# Altium PCB Son_BU_ESP32_V1.PcbDoc
Units mil, origin at the board's own origin, x right, y up, seen from the top; angles counter-clockwise.
Board outline 6000 x 4000 mil, 2 copper layers (Top Layer, Bottom Layer); 32 components, 22 nets, 120 pads, 27 vias.
Unrouted connection lines stored in the file: 1.
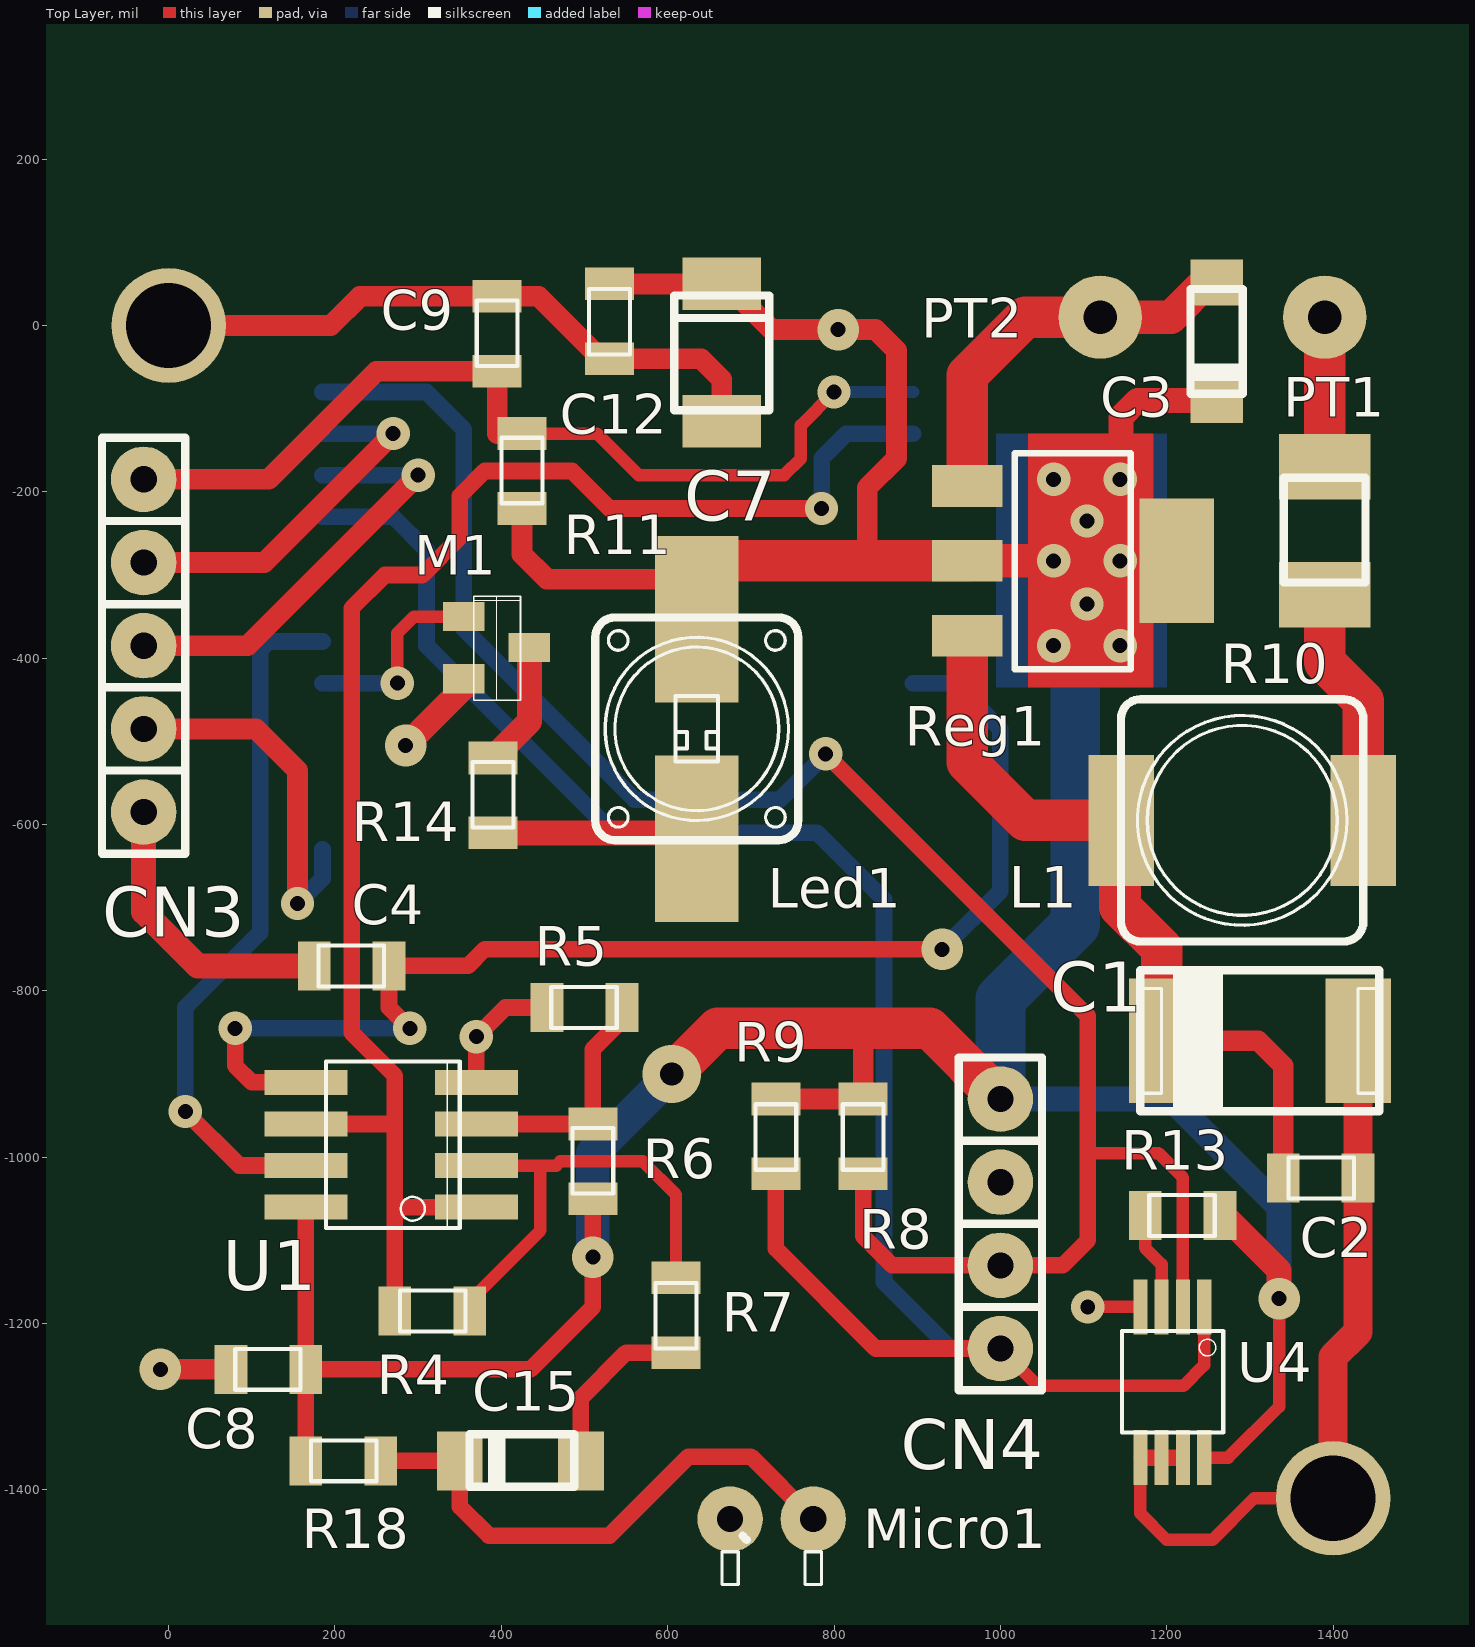
[diagram p0: Top Layer view]
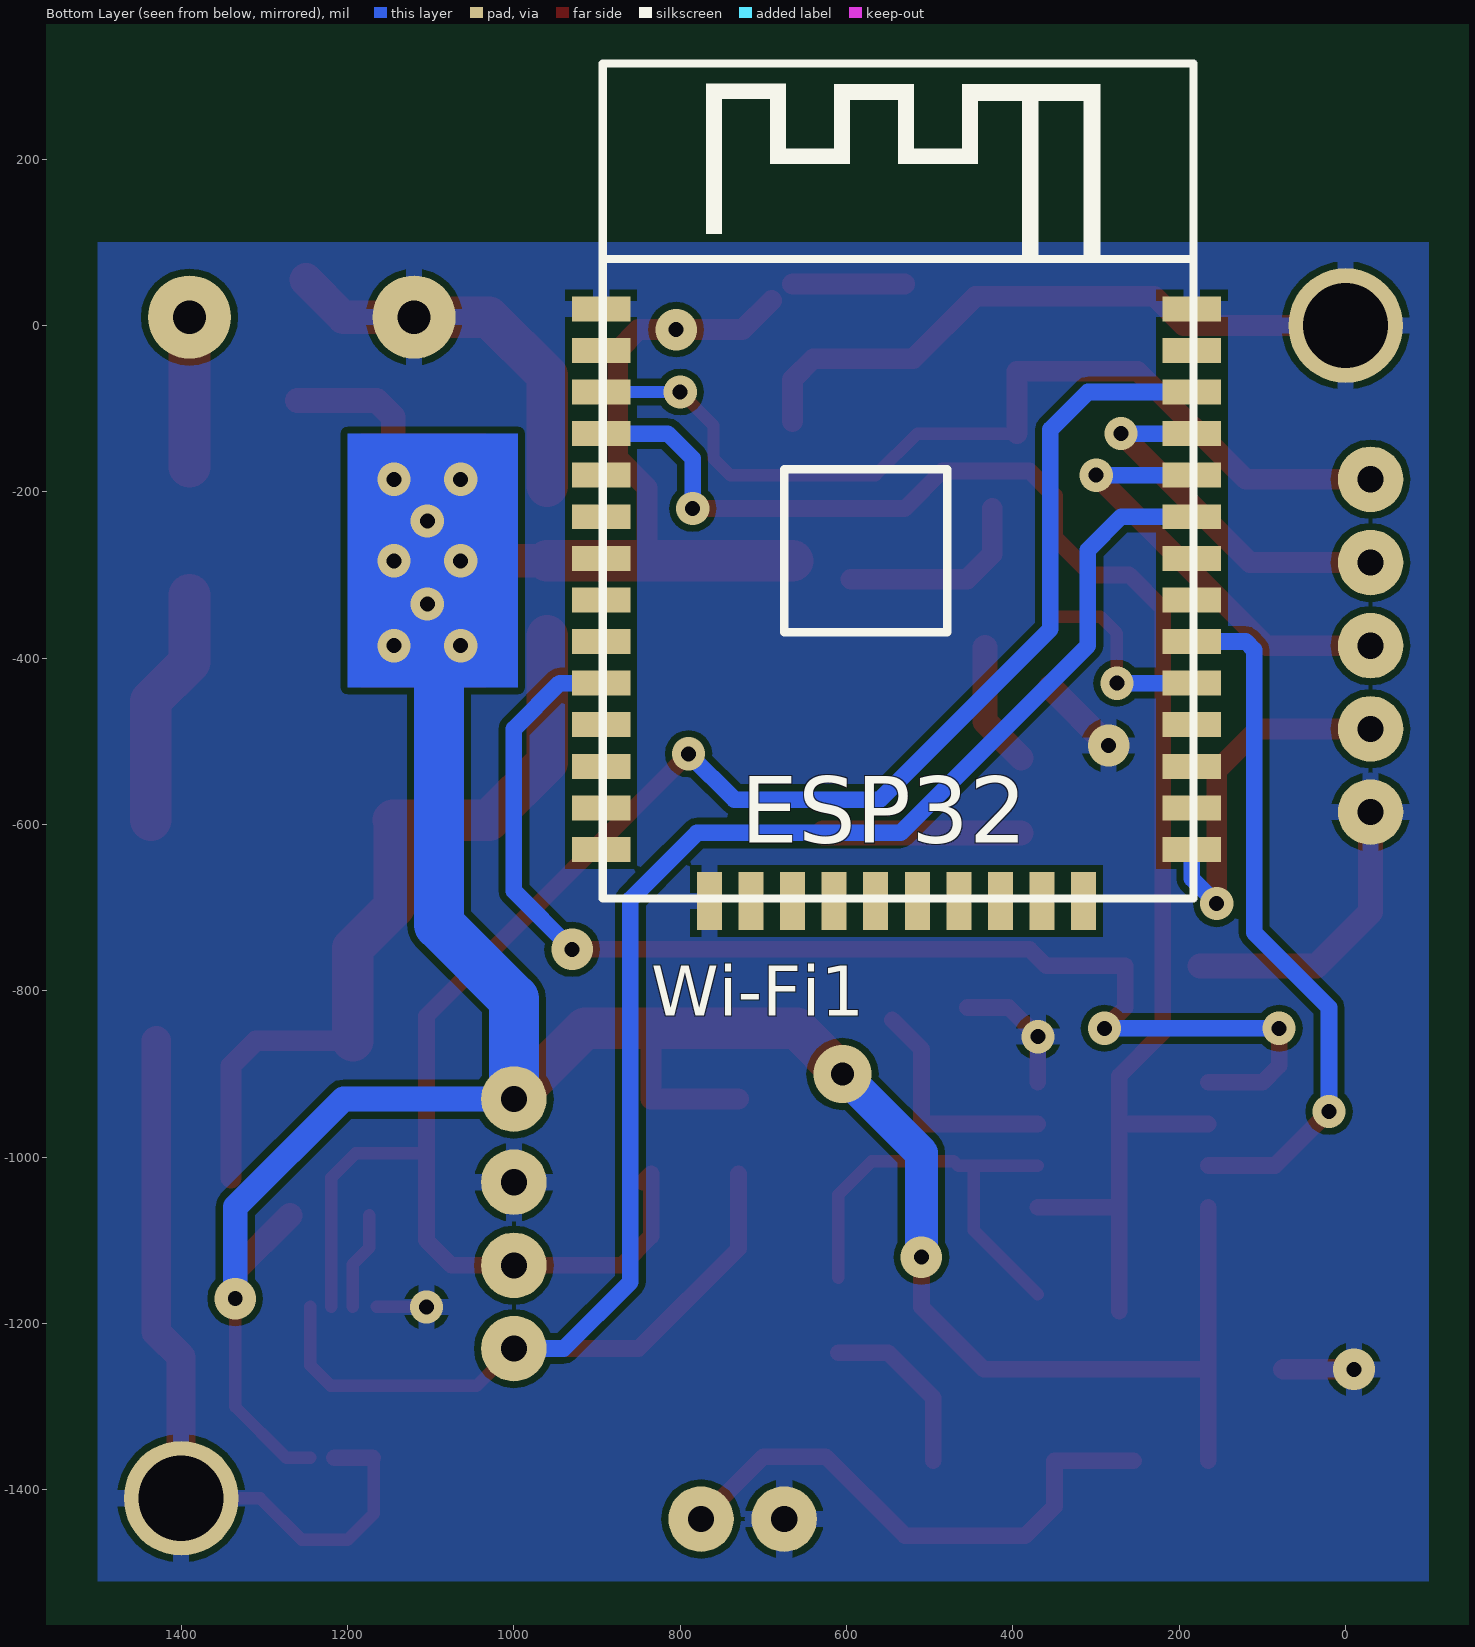
[diagram p1: Bottom Layer view, seen from below]

## Layer stack, top to bottom
Top Layer: signal copper 1.4
Dielectric: dielectric 12.6, FR-4, Dk 4.8
Bottom Layer: signal copper 1.4

## Board outline
-1140,-2505 4860,-2505 4860,1495 -1140,1495

## Design rules (kind name [scope] priority, off if disabled: settings)
AssemblyTestPointUsage [All] p1 off:
Clearance [All] p1 off: gap=8
ComponentClearance [All] p1 off: gap=5 collisioncheckmode=3 verticalgap=10 showdistances=FALSE
DiffPairsRouting [All] p1 off: maxlimit=10 minlimit=10 mostfreqgap=10 maxuncoupledlength=500
FabricationTestPointUsage [All] p1 off: valid=0 allowmultiple=FALSE
FabricationTestpoint [All] p1 off: side=3 testpointundercomponent=TRUE minsize=40 maxsize=100 preferedsize=60 minholesize=0 maxholesize=40 preferedholesize=32 testpointgrid=1 allowsidetop=TRUE allowsidebottom=TRUE usegrid=TRUE gridtolerance=0.01
FanoutControl Fanout_BGA [IsBGA] p1 off: bgadir=Out bgaviamode=Centered fanoutstyle=Auto fanoutdirection=Alternating viagrid=1 // Fanout_BGA (Default Rule)
FanoutControl Fanout_LCC [IsLCC] p2 off: bgadir=Out bgaviamode=Centered fanoutstyle=Auto fanoutdirection=Alternating viagrid=1 // Fanout_LCC (Default Rule)
FanoutControl Fanout_SOIC [IsSOIC] p3 off: bgadir=Out bgaviamode=Centered fanoutstyle=Auto fanoutdirection=Alternating viagrid=1 // Fanout_SOIC (Default Rule)
FanoutControl Fanout_Small [(CompPinCount < 5)] p4 off: bgadir=Out bgaviamode=Centered fanoutstyle=Auto fanoutdirection=OutThenIn viagrid=1 // Fanout_Small (Default Rule)
FanoutControl Fanout_Default [All] p5 off: bgadir=Out bgaviamode=Centered fanoutstyle=Auto fanoutdirection=Alternating viagrid=1 // Fanout_Default (Default Rule)
Height [All] p1 off: minheight=0 maxheight=1000 prefheight=500
PolygonConnect [All] p1: connectstyle=Relief reliefconductorwidth=20 reliefentries=4 polygonreliefangle="90 Angle"
RoomDefinition Son_BU_ESP32_V1 [InComponentClass('Son_BU_ESP32_V1')] p1: confinementstyle=ConfineIn formatcopy=TRUE lockcomponents=FALSE outline -250,-1560 1635,-1560 1635,390 -250,390
RoutingVias [All] p1: holewidth=28 width=50 viastyle="Through Hole" minholewidth=28 minwidth=50 maxholewidth=28 maxwidth=50
SilkscreenOverComponentPads [All] p1: minsilkscreentomaskgap=10
SolderMaskExpansion [All] p1: expansion=4
Width [All] p1: maxlimit=100 minlimit=10 preferedwidth=10
16 further rules are at their usual default settings.

## Components (designator, comment, footprint, x,y, rotation, side; value= is the part's Value field where it differs from the comment)
C1 "220µF/16V" 7343-31 1430,-860 r180 top
C2 "100n" 0805 1430,-1025 r180 top
C3 "10µF/16V" "Tantale 10µF/16V" 1260,-90 r270 top
C4 "100n" 0805 175,-770 r0 top
C7 "47µF/10V tantale" "tantale 47µF/10V" 665,50 r270 top
C8 "100n" 0805 75,-1255 r0 top
C9 "47n" 0805 395,35 r270 top
C12 "100n" 0805 530,-40 r90 top
C15 "1µF/16V" 3216-18 350,-1365 r0 top
CN3 "inch_ligne 1x5" INCH_1x5_droit -30,-185 r270 top
CN4 "inch_ligne 1x4" INCH_1x4_droit 1000,-930 r270 top
L1 "70µH CD74R series" "SELF CD74R" 1145,-595 r180 top
Led1 "LTW5AM" LTW5AM 635,-485 r270 top
M1 "NTR4501N" "SOT23 (NTR4501)" 355,-350 r270 top
Micro1 "Electret" "Micro_electret simple" 775,-1435 r0 top
PT1 "+ Alim" "Pointe de test"#1 1360,15 r0 top
PT2 "- Alim" "Pointe de test"#2 1194,15 r0 top
R4 "100K" 0805 362,-1185 r180 top
R5 "10K" 0805 455,-820 r0 top
R6 "10K" 0805 510,-960 r270 top
R7 "1K" 0805 610,-1235 r90 top
R8 "10K" 0805 835,-1020 r90 top
R9 "10K" 0805 730,-1020 r90 top
R10 "0R33" 1210 1390,-170 r270 top
R11 "10K" 0805 425,-130 r270 top
R13 "10K" 0805 1174,-1070 r0 top
R14 "68" 0805 390,-520 r270 top
R18 "2K" 0805 255,-1365 r180 top
Reg1 "LM1117" SOT223 960,-193 r270 top
U1 "AD8052" SOIC08 370,-1060 r180 top
U4 "MCP9808" MSOP-08 1245,-1180 r270 top
Wi-Fi1 "ESP32" ESP32 895,-630 r180 bottom

## Footprints (in the part's own frame and the unit in brackets; to place one, negate y for a bottom-side part, rotate by r counter-clockwise, add the part's x,y. Pads: shape width x height; smd on the part's side, far side on the other; paste and mask are expansions set on the pad)
0805 [mm] "résistance CMS"
  rect 1x1.5 smd: 1(0,0) 2(2.286,0)
  silkscreen extent 0.13,-0.63 2.13,0.63
1210 [mm] "résistance CMS 0,5W ERJ14B"
  rect 2x2.8 smd: 1(0,0) 2(3.9,0)
  silkscreen extent 0.33,-1.26 3.53,1.24
3216-18 [mm] "condensateur tantale CMS (3,2 x 1,6 x 1,6)"
  rect 1.4x1.8 smd: 1(0,0) 2(3.7,0)
  silkscreen extent 0.3,-0.79 3.5,0.81
7343-31 [mm] "condensateur tantale CMS (7,3 x 4,3 x 3,0)"
  rect 2x3.8 smd: 1(6,0) 2(0,0)
  silkscreen extent -0.65,-2.15 6.65,2.15
ESP32 [mil] "module Wi-Fi"
  rect 70x30 smd: 1(0,650) 2(0,600) 3(0,550) 4(0,500) 5(0,450) 6(0,400) 7(0,350) 8(0,300) 9(0,250) 10(0,200) 11(0,150) 12(0,100) 13(0,50) 14(0,0) 25(710,0) 26(710,50) 27(710,100) 28(710,150) 29(710,200) 30(710,250) 31(710,300) 32(710,350) 33(710,400) 34(710,450) 35(710,500) 36(710,550) 37(710,600) 38(710,650)
  rect 30x70 smd: 15(130,-62) 16(180,-62) 17(230,-62) 18(280,-62) 19(330,-62) 20(380,-62) 21(430,-62) 22(480,-62) 23(530,-62) 24(580,-62)
  silkscreen extent 2,-59 712,945
INCH_1x4_droit [mm] "simple rangée 2,54 mm"
  round 2 hole 0.8: 1(0,0) 2(2.54,0) 3(5.08,0) 4(7.62,0)
  silkscreen extent -1.27,-1.27 8.89,1.27
INCH_1x5_droit [mm] "simple rangée 2,54 mm"
  round 2 hole 0.8: 1(0,0) 2(2.54,0) 3(5.08,0) 4(7.62,0) 5(10.16,0)
  silkscreen extent -1.27,-1.27 11.43,1.27
LTW5AM [mil] "LED golden dragon"
  rect 200x100 smd: 1(-132,0) 2(132,0)
  silkscreen extent -134,-122 134,122
"Micro_electret simple" [mm] "Microphone coudé sur PCB sans sérigraphie"
  round 2 hole 0.8: 0(-2.54,0) 1(0,0)
  silkscreen extent -2.79,-2 0.25,-0.51
MSOP-08 [mil] "boîtier DGK"
  rect 66x17 smd: 1(0,0) 2(0,-25.59) 3(0,-51.18) 4(0,-76.77) 5(181.1,-76.77) 6(181.1,-51.18) 7(181.1,-25.59) 8(181.1,0)
  silkscreen extent 29,-99 151,23
"Pointe de test"#1 [mil] "Farnell 133-6225"
  round 100 hole 40: 1(30,-5)
"Pointe de test"#2 [mil] "Farnell 133-6225"
  round 100 hole 40: 1(-74,-5)
"SELF CD74R" [mm] "Self 7,4 x 7,4"
  rect 2x4 smd: 1(0,0) 2(-7.4,0)
  silkscreen extent -7.4,-3.7 0,3.7
SOIC08 [mil]
  rect 100x30 smd: 1(0,0) 2(0,-50) 3(0,-100) 4(0,-150) 5(205,-150) 6(205,-100) 7(205,-50) 8(205,0)
  silkscreen extent 20,-175 181,25
"SOT23 (NTR4501)" [mil] "D->1 G->2 S->3"
  rect 35x50 smd: 1(37.4,78.74) 2(0,0) 3(74.8,0)
  silkscreen extent -25,12 100,68
SOT223 [mil] "empreinte générale SOT223"
  rect 50x84.65 smd: 1(0,0) 2(90,0) 3(180,0)
  rect 150x90 smd: 2(90,251.97)
  silkscreen extent -39,57 220,197
"Tantale 10µF/16V" [mm] "1206 ou 3216-18 (145-7461)"
  rect 1.4x1.6 smd: 1(0,0) 2(-3.6,0)
  silkscreen extent -3.4,-0.81 -0.2,0.8
"tantale 47µF/10V" [mm] "1210 ou 3528-21 (175-4168)"
  rect 1.6x2.4 smd: 1(0,0) 2(4.2,0)
  silkscreen extent 0.36,-1.45 3.86,1.45

## Part data
C1: library part "tantale 220µF/16V", "253-5290 case 7343-31"
C2 C4 C8 C9 C12: library part Cap_CMS_0805, "CMS 0805"
C3: library part "tantale 10µF/16V", "145-7461 case 3216-18"
C7: library part "tantale 47µF/10V", "175-4168"
C15: library part "tantale 1µF/16V", "145-7406 case 3216-18"
CN3: library part Inch_1x5_droit, "Inch_1x5_droit"
CN4: library part Inch_1x4_droit, "Inch_1x4_droit"
L1: library part "Self CD74R", "SMT CD74R Aliexpress"
Led1: library part "LTW5AM LED", "LED Golden Dragon Plus"
M1: "MOSFET canal N"
Micro1: library part Microphone_03, "Microphone électret"
PT1 PT2: library part PTEST, "pointe de test CI 133-6225"
R4 R5 R6 R7 R8 R9 R11 R13 R14 R18: library part "Res CMS 0805", "CMS 0805"
R10: library part "Res CMS 1210 ERJ14B", "CMS 1210"
Reg1: library part LM1117/800mA, "Régulateur SOT-223"
U1: "AOP"
U4: "Digital temperature Sensor"
Wi-Fi1: "ESP32 module µC Bluetooth Wi-Fi"

## Free pads (board coordinates)
  round 137.8 hole 102.36: 1(0,0) 2(1400,-1410)

## Via types
v1: diameter 40, hole 18, Top Layer to Bottom Layer, 20 vias
v2: diameter 50, hole 18, Top Layer to Bottom Layer, 6 vias
v3: diameter 70, hole 28, Top Layer to Bottom Layer, 1 vias

## Nets (pads, with @x,y where several pads share a name; then routed paths per layer and width w, separated by ;. In a path a pad name is that pad's centre, name@x,y a point inside that pad or via, vN(x,y) a via of type N, cw(c..) or ccw(c..) an arc to the next point about the centre after c; other vN are vias at no path point)
3V3: C3.1 C7.1 C8.2 C12.2 CN4.1 Led1.1 R6.2 R8.2 R9.2 R11.2 R13.2 R18.2 Reg1.2 U1.8 U4.8 Wi-Fi1.2 | length 4511.2
  Top Layer w15: U4.8 1273.9,-1361.1 1335,-1300 v2(1335,-1170)
  Top Layer w20: R18.2 C8.2 ; U1.8 C8.2 ; R6.2 v2(510,-1120) 510,-1180 435,-1255 C8.2
  Top Layer w25: R11.2 425,-275 455,-305 Led1.1@595,-305 ; C12.2 C7.1 ; C7.1@690,30 725,-5 v2(805,-5) 850,-5 875,-30 875,-160 840,-195 840,-265 ; R9.2 R8.2 835,-850
  Top Layer w30: 1145,-145 1145,-110 1165,-90 C3.1 ; R13.2@1269,-1070 1335,-1136 v2(1335,-1170)
  Top Layer w40: Reg1.2@960,-283 v1(1064,-283)
  Top Layer w50: v3(605,-900) 660,-845 915,-845 CN4.1 ; Led1.1@665,-283 Reg1.2@960,-283
  Bottom Layer w30: CN4.1 1205,-930 1335,-1060 v2(1335,-1170)
  Bottom Layer w40: v2(510,-1120) 510,-995 v3(605,-900)
  Bottom Layer w60: CN4.1 1000,-810 1090,-720 1090,-425
  other v1: 1064,-385 1144,-385 1104,-335 1144,-283 1104,-235 1064,-185 1144,-185
ENABLE: C9.2 CN3.1 R11.1 Wi-Fi1.3 | length 1139.4
  Top Layer w15: 395,-130 R11.1 515,-130 565,-180 740,-180 760,-160 760,-120 v1(800,-80)
  Top Layer w25: CN3.1 120,-185 250,-55 C9.2 395,-130
  Bottom Layer w15: v1(800,-80) Wi-Fi1.3
GND: C1.2 C2.1 C3.2 C4.1 C7.2 C8.1 C9.1 C12.1 CN3.5 CN4.2 M1.3 Micro1.0 pad.1 pad.2 PT2.1 R5.1 Reg1.1 U1.4 U4.4 U4.5 U4.6 U4.7 Wi-Fi1.1 Wi-Fi1.15 Wi-Fi1.38 | length 2933.3
  Top Layer w15: v1(1105,-1180) U4.4@1164.82,-1180 ; U4.5 1168.23,-1428.23 1200,-1460 1255,-1460 1305,-1410 pad.2
  Top Layer w20: U1.4 v1(370,-855) 405,-820 R5.1 ; U4.5@1170,-1361.1 U4.6 U4.7@1216,-1361.1
  Top Layer w25: v2(-10,-1255) C8.1 ; pad.1 195,0 230,35 C9.1 445,35 520,-40 C12.1 640,-40 665,-65 C7.2
  Top Layer w30: CN3.5 -30,-705 35,-770 C4.1 ; v2(285,-505) M1.3@355,-435
  Top Layer w35: pad.2 1400,-1240 1430,-1210 C2.1 C1.2
  Top Layer w40: PT2.1 1205,10 C3.2@1250,55
  Top Layer w50: Reg1.1 960,-60 1030,10 PT2.1
GPIO0: CN3.4 Wi-Fi1.25 | length 443.1
  Top Layer w25: CN3.4 105,-485 155,-535 v1(155,-695)
  Bottom Layer w20: v1(155,-695) 185,-665 Wi-Fi1.25
NetC1_1: C1.1 C2.2 L1.1 Reg1.3 | length 945.9
  Top Layer w25: C1.1@1195,-861.22 C1.1 1310,-860 1340,-890 C2.2
  Top Layer w50: Reg1.3 960,-525 1030,-595 L1.1 ; L1.1@1143.78,-596.22 1143.78,-698.78 1193.78,-748.78 C1.1
NetC4_2: C4.2 U1.5 Wi-Fi1.10 | length 1553.7
  Top Layer w20: v1(80,-845) 80,-890 100,-910 U1.5 U1.5@140,-910 ; v1(290,-845) 265,-820 C4.2 360,-770 380,-750 v2(930,-750)
  Bottom Layer w20: v1(80,-845) v1(290,-845) ; Wi-Fi1.10 945,-430 1000,-485 1000,-680 v2(930,-750)
NetC15_1: C15.1 Micro1.1 R18.1 | length 659.9
  Top Layer w20: R18.1 C15.1 350,-1420 385,-1455 530,-1455 625,-1360 700,-1360 Micro1.1
NetC15_2: C15.2 R7.1 | length 212.5
  Top Layer w20: C15.2 495.67,-1289.33 550,-1235 R7.1
NetCN4_3: CN4.3 R8.1 U4.2 Wi-Fi1.36 | length 2355.1
  Top Layer w15: 1105,-995 1190,-995 1219.41,-1024.41 U4.2
  Top Layer w20: v1(790,-515) 1105,-830 1105,-995 1105,-1100 1075,-1130 CN4.3 870,-1130 835,-1095 R8.1 R8.1@845,-1030
  Bottom Layer w20: Wi-Fi1.36 310,-80 355,-125 355,-365 560,-570 735,-570 v1(790,-515)
NetCN4_4: CN4.4 R9.1 U4.1 Wi-Fi1.33 | length 2319.7
  Top Layer w15: CN4.4 1045,-1275 1220,-1275 1245,-1250 U4.1
  Top Layer w20: R9.1 730,-1110 850,-1230 CN4.4
  Bottom Layer w20: Wi-Fi1.33 270,-230 310,-270 310,-385 535,-610 780,-610 860,-690 860,-1150 940,-1230 CN4.4
NetL1_2: L1.2 R10.2 | length 290.7
  Top Layer w50: R10.2 1390,-405 1436.34,-451.34 L1.2
NetLed1_2: Led1.2 R14.2 | length 238
  Top Layer w30: R14.2 Led1.2@628,-610
NetM1_1: M1.1 R14.1 | length 150.7
  Top Layer w30: R14.1 433.74,-476.26 M1.1
NetM1_2: M1.2 Wi-Fi1.29 | length 238.3
  Top Layer w15: v1(275,-430) 275,-370 295,-350 M1.2
  Bottom Layer w20: Wi-Fi1.29 v1(275,-430)
NetPT1_1: PT1.1 R10.1 | length 180
  Top Layer w50: R10.1 PT1.1
NetR4_1: R4.1 R7.2 U1.2 | length 545.5
  Top Layer w15: R4.1@370,-1165 447,-1088 447,-1010 ; U1.2 447,-1010 ; R7.2 610,-1045 570,-1005 471,-1005 466,-1010 447,-1010
NetR4_2: R4.2 U1.1 U1.6 Wi-Fi1.4 | length 1930.2
  Top Layer w20: U1.6 272,-960 ; R4.2 272,-960 ; 277,-1060 U1.1 ; v1(785,-220) 530,-220 485,-175 380,-175 350,-205 350,-255 305,-300 260,-300 220,-340 220,-850 272,-902 272,-960
  Bottom Layer w20: v1(785,-220) 785,-160 815,-130 Wi-Fi1.4
NetR5_2: R5.2 R6.1 U1.3 | length 279.5
  Top Layer w20: U1.3 R6.1 510,-870 R5.2@545,-835
NetR13_1: R13.1 U4.3 | length 118.2
  Top Layer w15: R13.1 1174,-1109 1193.82,-1128.82 U4.3
NetU1_7: U1.7 Wi-Fi1.30 | length 843.3
  Top Layer w20: v1(20,-945) 85,-1010 U1.7
  Bottom Layer w20: v1(20,-945) 20,-820 110,-730 110,-390 120,-380 Wi-Fi1.30
RXD0: CN3.3 Wi-Fi1.34 | length 529.9
  Top Layer w25: CN3.3 95,-385 v1(300,-180)
  Bottom Layer w20: Wi-Fi1.34 v1(300,-180)
TXD0: CN3.2 Wi-Fi1.35 | length 449.2
  Top Layer w25: CN3.2 115,-285 v1(270,-130)
  Bottom Layer w20: Wi-Fi1.35 v1(270,-130)
pads on no net: Wi-Fi1.5 Wi-Fi1.6 Wi-Fi1.7 Wi-Fi1.8 Wi-Fi1.9 Wi-Fi1.11 Wi-Fi1.12 Wi-Fi1.13 Wi-Fi1.14 Wi-Fi1.16 Wi-Fi1.17 Wi-Fi1.18 Wi-Fi1.19 Wi-Fi1.20 Wi-Fi1.21 Wi-Fi1.22 Wi-Fi1.23 Wi-Fi1.24 Wi-Fi1.26 Wi-Fi1.27 Wi-Fi1.28 Wi-Fi1.31 Wi-Fi1.32 Wi-Fi1.37

## Polygon pours and split planes (outlines as drawn)
GND on Bottom Layer "Bottom Layer-No Net" (solid): -100,100 1500,100 1500,-1510 -100,-1510 -100,100

## Other copper
Top Layer:
  rectangle net 3V3: 1033,-435 1184,-130
Bottom Layer:
  rectangle net 3V3: 995,-435 1200,-130

## Silkscreen, mask and mechanical layers (free items; w line width, h text height)
Mechanical 1:
  lines w10: -100,-1510 -100,100 1500,100 1500,-1510 -100,-1510